# Altium PCB bch-stmnode_v0.2.PcbDoc (part 3 of 3)
Units mm, origin at the board's own origin, x right, y up, seen from the top; angles counter-clockwise.
Board outline 93.3 x 100 mm, 4 copper layers (Top Layer, GND, VCC, Bot Layer), stack 1.564 mm thick; 151 components, 115 nets, 605 pads, 422 vias.
Unrouted connection lines stored in the file: 4.
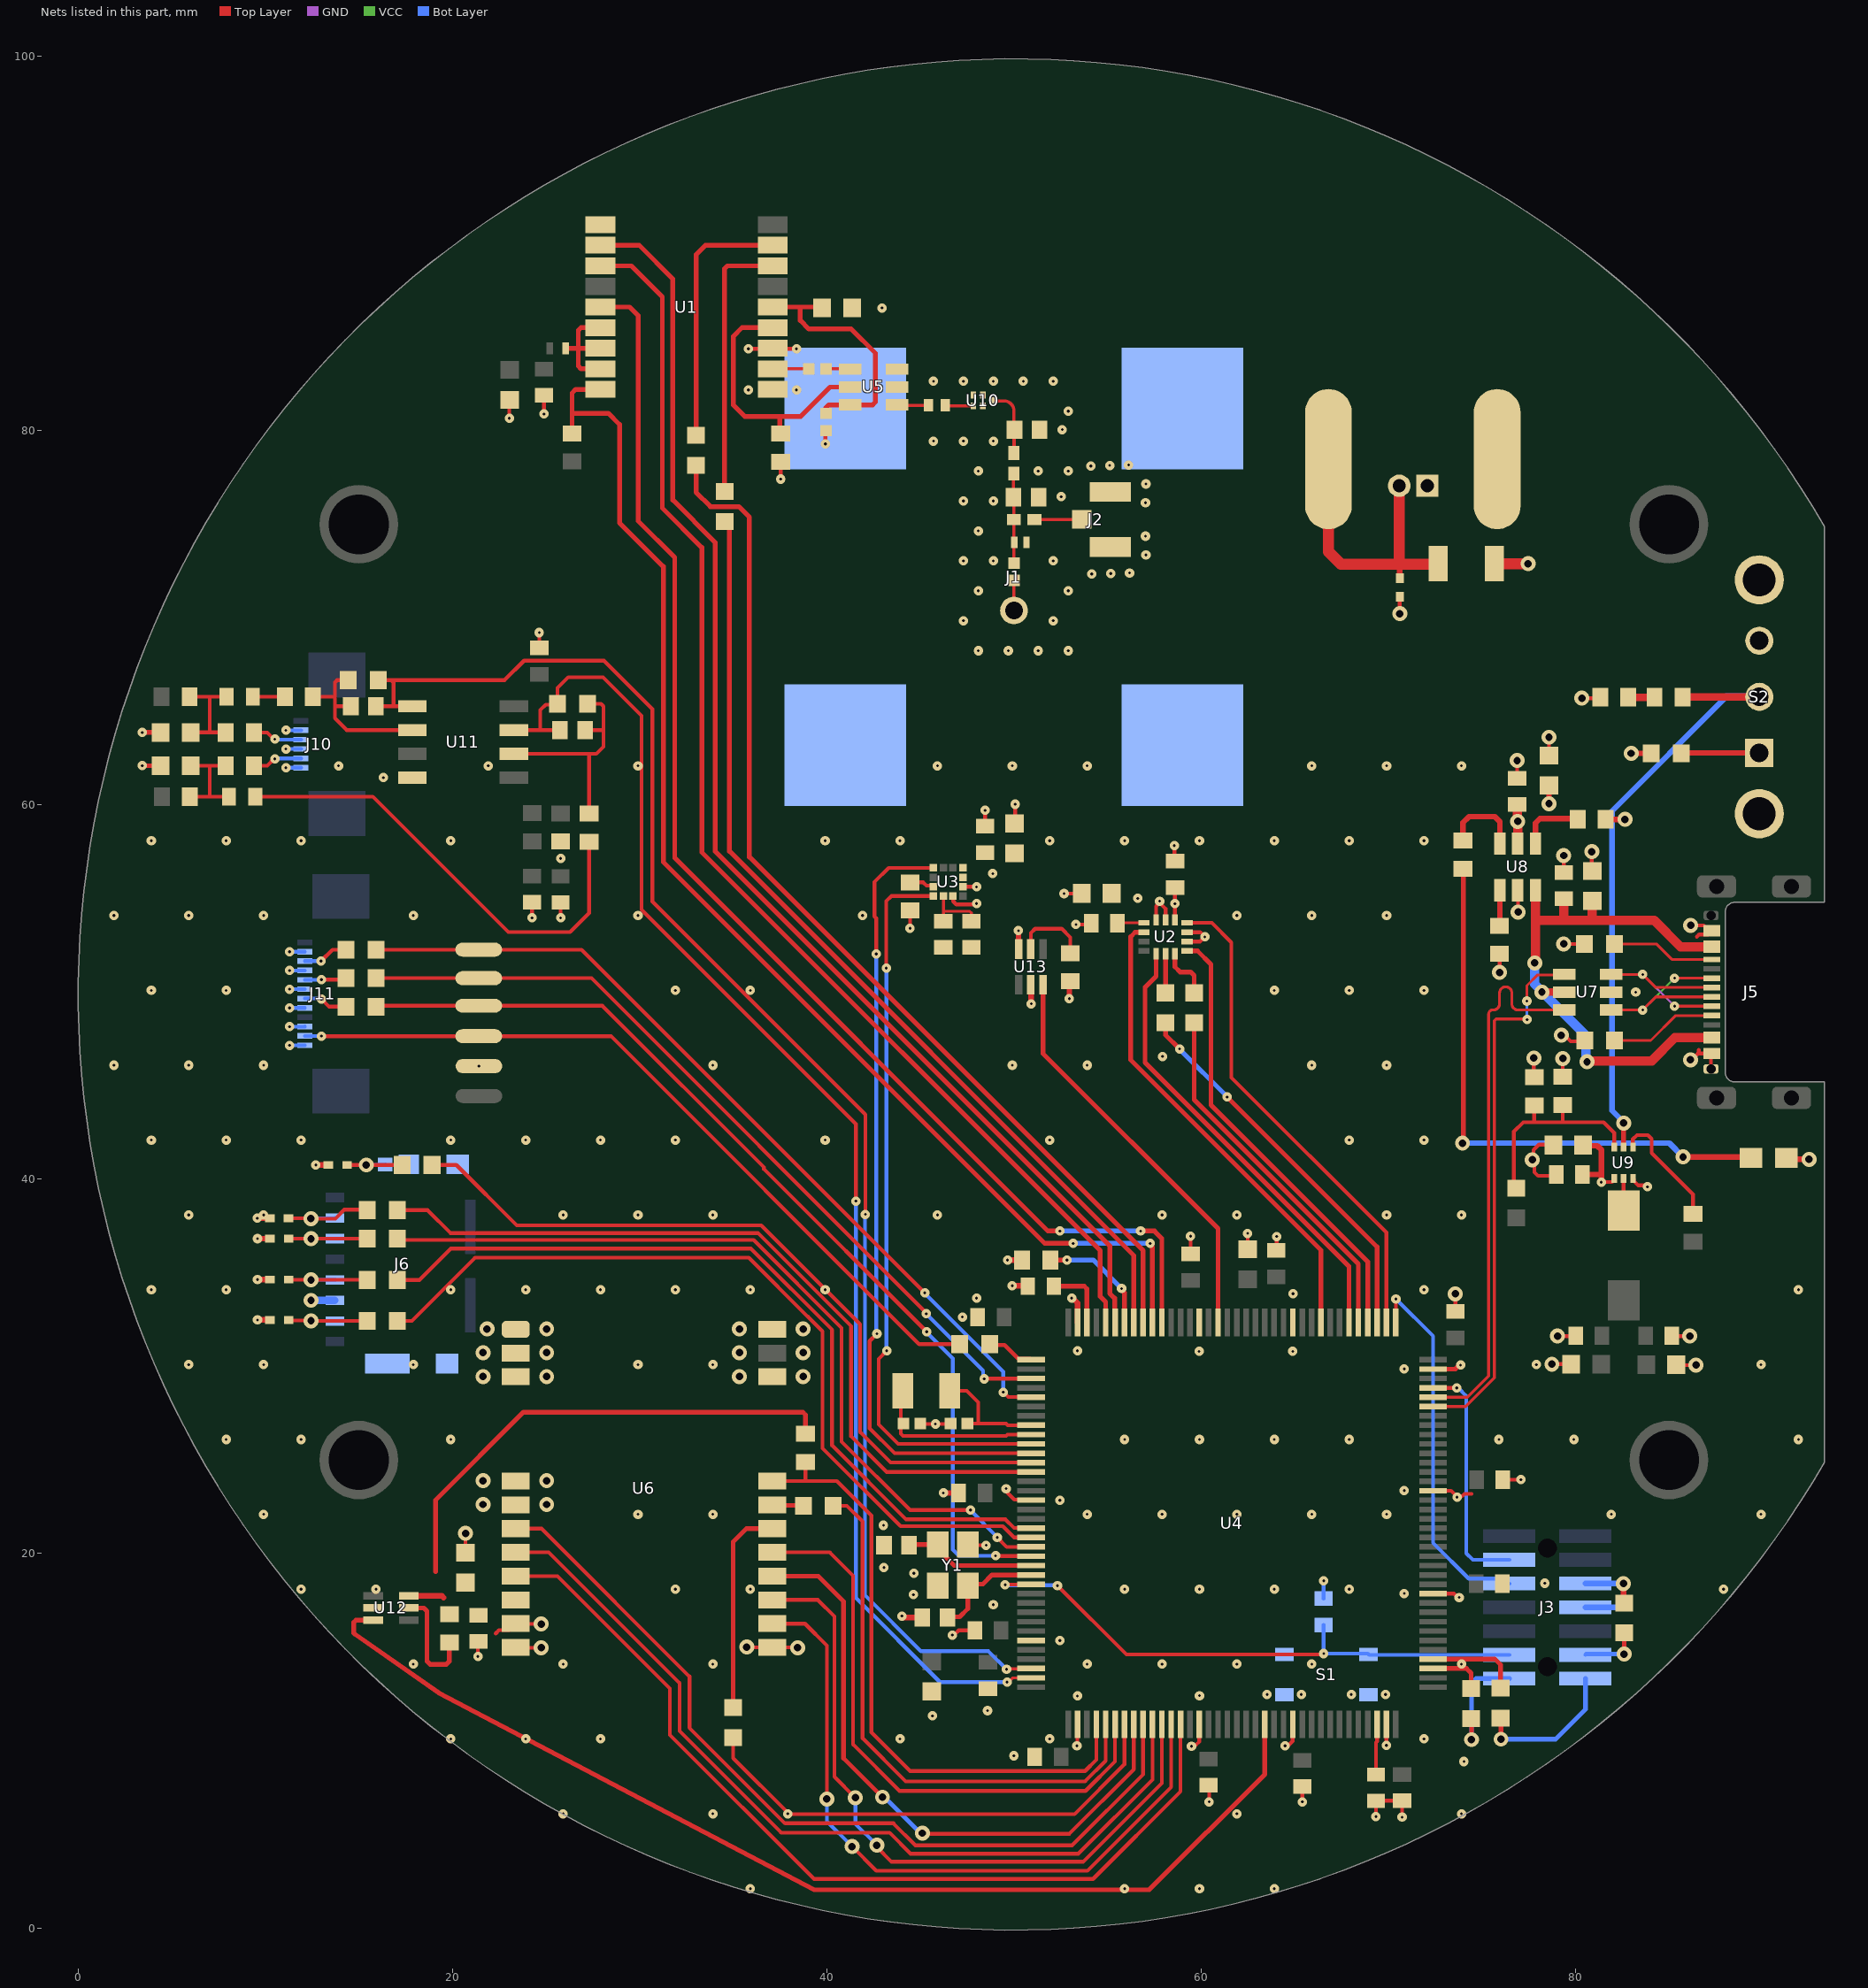
[diagram p4: the nets of this part, all layers, seen from the top]

## Via types
v1: diameter 0.5, hole 0.15, Top Layer to Bot Layer, 346 vias
v2: diameter 0.8, hole 0.4, Top Layer to Bot Layer, 76 vias

## Nets (pads, with @x,y where several pads share a name; then routed paths per layer and width w, separated by ;. In a path a pad name is that pad's centre, name@x,y a point inside that pad or via, vN(x,y) a via of type N, cw(c..) or ccw(c..) an arc to the next point about the centre after c; other vN are vias at no path point) (continued)
+3VIMU: C5.1 C49.1 C50.1 C51.1 C52.1 R58.2 R59.2 U2.5 U2.8 U3.9 U3.10 U13.6 | length 6.1
  Top Layer w0.15: C5.1@55.525,53.683 55.547,53.706 U2.8@56.949,53.706
  Top Layer w0.2: v1(44.45,53.416) R59.2@44.45,54.368 ; U2.5@58.599,53.875 58.599,55.589 C50.1@58.609,55.599
  Top Layer w0.3: v1(50.241,53.289) 50.246,53.284 50.246,52.304 U13.6@50.252,52.299 ; v1(52.959,49.657) 52.959,50.533 R58.2@53.01,50.583
  other v1: 58.599,54.732 56.617,55.016 48.87,56.337
+3VLORA: C9.1 C29.1 R12.2 R57.2 U6.9 U12.6 | length 28.5
  Top Layer w0.25: 19.101,19.028 19.101,22.86 23.8,27.559 38.716,27.559 38.862,27.413 R12.2@38.862,26.404
  Top Layer w0.3: U12.6@17.663,17.744 19.441,17.744 19.533,17.653
+V_USB: C31.1 C32.1 J5.A4 J5.A9 U7.5 U8.6 | length 30.8
  Top Layer w0.15: J5.A4@87.288,47.574 J5.A4@87.292,47.57 ; J5.A9@87.288,52.426 J5.A9@87.292,52.43
  Top Layer w0.4: v2(78.208,50) U7.5@79.4,50
  Top Layer w0.5: v2(77.826,51.562) 77.861,51.598 U8.6@77.861,55.443 ; 78.042,53.848 79.426,53.848 ; C32.1@79.375,55.002 79.375,53.899 79.426,53.848 ; v2(80.62,46.279) 80.67,46.33 84.074,46.33 85.319,47.574 J5.A4@87.288,47.574 ; C31.1@80.899,54.877 80.899,53.848 ; J5.A9@87.288,52.426 85.623,52.426 84.201,53.848 80.899,53.848 ; 79.426,53.848 80.899,53.848
  Bot Layer w0.5: v2(77.826,51.562) 77.826,50.443 78.208,50.06 v2(78.208,50) ; v2@78.247,49.997 80.566,47.679 80.566,46.333 v2(80.62,46.279)
+VCAP1: C39.1 U4.70 | length 2.7
  Top Layer w0.2: C39.1@69.342,8.193 69.342,9.906 69.399,9.963 69.399,10.869 U4.70@69.402,10.872
+VCAP2: C40.1 U4.142 | length 3.6
  Top Layer w0.25: C40.1@52.135,34.29 53.756,34.29 53.902,34.144 U4.142@53.902,32.348
ANT_OFF_3: R32.2 U1.13 U5.5 | length 14.1
  Top Layer w0.254: U1.13@37.112,85.514 35.476,85.514 35.001,85.039 35.001,81.382 35.611,80.772 37.49,80.772 ; R32.2@37.541,79.846 37.49,79.896 37.49,80.772 ; U5.5@41.25,82.337 40.173,82.337 38.608,80.772 37.49,80.772
BAT+: C24.1 C25.1 C33.1 C34.1 D1.1 F1.2 R22.2 U8.2 U9.1 | length 11.8
  Top Layer w0.2: v1(81.382,39.846) 81.389,39.853 81.96,39.853 82.075,39.969 U9.1@82.075,40.056
  Top Layer w0.3: v2(78.588,60.071) C33.1@78.588,61.049 ; C25.1@80.38,40.259 81.382,40.259 ; C24.1@80.416,41.834 80.454,41.796 81.166,41.796 81.382,41.579 81.382,40.259 ; v1(81.382,39.846) 81.382,40.259 ; v2(82.982,62.763) R22.2@84.049,62.763 ; D1.1@91.272,41.148 91.349,41.072 v2(92.481,41.072)
  Top Layer w0.5: C34.1@76.886,60.031 76.898,60.019 76.898,59.144 v2(76.911,59.131) U8.2@76.911,57.943
  Top Layer w0.6: F1.2@75.668,72.898 v2(77.47,72.898)
BAT_ULVO_5: R23.2 S2.2 U9.5 | length 33.4
  Top Layer w0.2: R23.2@85.725,65.761 R23.2@85.75,65.786
  Top Layer w0.25: U9.5@82.575,41.732 v2(82.575,43.002)
  Top Layer w0.4: R23.2@85.75,65.786 S2.2@90.17,65.786
  Bot Layer w0.3: v2(82.575,43.002) 82.575,43.058 81.952,43.682 81.952,59.676 88.062,65.786
  Bot Layer w0.4: 88.062,65.786 S2.2@90.17,65.786
BUSY: U4.47 U6.14 | length 37.4
  Top Layer w0.2: U6.14@37.084,17.526 39.522,17.526 40.411,16.637 40.411,8.077 v2(41.529,6.96) ; v2(42.672,4.42) 42.672,4.318 43.459,3.531 53.696,3.531 57.902,7.737 U4.47@57.902,10.872
  Bot Layer w0.2: v2(41.529,6.96) 41.529,5.563 v2(42.672,4.42)
CLK: R3.1 U4.41 | length 29.8
  Top Layer w0.2: R3.1@40.348,22.555 41.072,22.555 41.91,21.717 41.91,10.135 44.221,7.823 53.797,7.823 54.902,8.928 U4.41@54.902,10.872
D_1_N: J5.A7 J5.B7 U7.3 | length 10.1
  Top Layer w0.15: U7.3@81.9,50.95 v1(83.594,50.95) 84.294,50.25 J5.A7@87.292,50.25 ; v1(85.296,49.25) J5.B7@87.292,49.25
  GND w0.11: v1@83.595,50.95 v1(85.296,49.25)
D_1_P: J5.A6 J5.B6 U7.1 | length 10.1
  Top Layer w0.15: U7.1@81.9,49.05 v1(83.594,49.05) 84.294,49.75 J5.A6@87.292,49.75 ; v1(85.293,50.749) J5.B6@87.292,50.75
  VCC w0.11: v1(83.594,49.05) v1(85.293,50.749)
DIO1: U4.48 U6.13 | length 37.5
  Top Layer w0.2: U6.13@37.084,16.256 38.837,16.256 40.005,15.088 v2(40.005,6.883) ; v2(41.351,4.343) 42.647,3.048 53.924,3.048 58.402,7.526 U4.48@58.402,10.872
  Bot Layer w0.2: v2(40.005,6.883) 40.005,5.69 v2(41.351,4.343)
DIO2: U4.49 U6.8 | length 49.2
  Top Layer w0.2: U6.8@23.384,18.796 25.611,18.796 31.623,12.784 31.623,10.312 39.319,2.616 54.229,2.616 58.902,7.289 U4.49@58.902,10.872
G\P\S\_\R\E\S\E\T\: R30.1 U1.9 U4.135 | length 69.6
  Top Layer w0.254: R30.1@26.391,79.858 26.391,80.937 ; U1.9@27.912,82.214 26.588,82.214 26.391,82.017 26.391,80.937 ; v1(53.162,36.576) 51.652,36.576 31.267,56.96 31.267,72.746 28.931,75.082 28.931,80.337 28.33,80.937 26.391,80.937 ; v1(57.277,36.576) 57.277,36.509 57.402,36.384 U4.135@57.402,32.348
  Bot Layer w0.254: v1(53.162,36.576) v1(57.277,36.576)
GND: C3.2 C4.2 C5.2 C6.2 C7.2 C8.1 C9.2 C10.2 C11.2 C12.2 C13.2 C14.2 C15.2 C16.2 C17.2 C18.2 C19.2 C20.2 C21.2 C22.2 C23.2 C24.2 C25.2 C26.2 C27.2 C28.2 C29.2 C30.2 C31.2 C32.2 C33.2 C34.2 C35.2 C36.2 C37.2 C38.2 C39.2 C40.2 C41.2 C42.2 C43.2 C44.2 C47.2 C48.2 C49.2 C50.2 C51.2 C52.2 C53.2 C54.2 C56.2 C57.2 D2.1 D3.2 D4.1 D5.1 D6.1 D7.1 D8.1 J1.2 J1.3 J1.4 J1.5 J2.2 J2.3 J3.5 J3.7 J4.1 J5.A1 J5.A12 J5.MH1 J6.6 J6.10 J6.11 J6.12 J6.13 J10.2 J10.4 J10.6 J11.2 J11.4 J11.6 J11.8 J11.10 J11.12 pad.4@75.819,78.486 pad.8@21.413,46.05 R9.1 R13.1 R17.2 R18.2 R19.1 R21.1 R24.1 R28.1 R29.2 R32.1 R49.2 S1.3 S1.4 S2.3 S2.4 S2.5 U1.1 U1.10 U1.12 U2.2 U2.3 U2.6 U2.7 U3.6 U3.8 U4.16 U4.31 U4.38 U4.51 U4.61 U4.71 U4.83 U4.94 U4.107 U4.120 U4.130 U4.143 U5.2 U5.3 U6.1 U6.2 U6.3 U6.4 U6.5 U6.10 U6.11 U6.12 U6.20 U6.22 U7.2 U8.5 U9.3 U10.2 U10.3 U10.5 U11.4 U12.2 U13.2 Y1.2 Y1.4 | length 106.5
  Top Layer w0.2: C29.2@20.701,20.053 v2(20.701,21.082) ; v1(21.361,14.503) 21.361,15.277 C9.2@21.387,15.302 ; 22.313,15.734 22.485,15.906 23.034,15.906 U6.10@23.384,16.256 23.402,16.238 v2(24.746,16.238) ; v1(23.038,80.67) 23.038,81.623 C3.2@23.063,81.648 ; U6.11@23.384,14.986 23.402,14.968 v2(24.746,14.968) ; v1(24.257,53.975) C56.2@24.257,54.799 ; C6.2@24.638,68.391 v1(24.638,69.215) ; v1(24.892,80.899) C4.2@24.892,81.901 ; v1(25.781,53.975) C57.2@25.781,54.799 ; v2(35.722,15.004) 35.74,14.986 U6.12@37.084,14.986 38.428,14.986 v2(38.446,14.968) ; v1(35.814,84.379) 37.077,84.379 U1.12@37.112,84.414 37.147,84.379 v1(38.379,84.379) ; v1(37.541,77.419) R32.1@37.541,78.346 ; v1(39.929,79.299) 39.929,79.982 C8.1@39.954,80.007 ; C47.2@45.002,26.949 45.026,26.925 46.592,26.925 C37.2@46.616,26.949 ; v1(46.711,15.646) 46.792,15.646 47.046,15.9 C10.2@47.916,15.9 ; U3.6@46.736,55.142 46.756,55.122 46.756,54.854 46.918,54.692 47.961,54.692 v1(48.006,54.737) ; U3.8@47.286,55.642 47.294,55.634 47.998,55.634 v1(48.006,55.626) ; Y1.2@47.536,20.48 47.569,20.447 v1(48.514,20.447) ; C52.2@48.463,58.866 v1(48.463,59.715) ; v1(49.581,23.47) 49.638,23.412 49.638,23.26 50.02,22.878 50.896,22.878 U4.16@50.914,22.86 ; C51.2@50.038,59.017 50.063,59.042 v1(50.063,60.046) ; U13.2@50.902,50.399 U13.2@50.914,50.386 ; v1@50.914,49.39 v1(50.927,49.378) ; v1(52.68,55.27) 53.605,55.27 C49.2@53.618,55.283 ; v1(53.315,53.619) 54.061,53.619 C5.2@54.125,53.683 ; v1(53.363,9.732) 53.383,9.751 53.383,10.853 U4.38@53.402,10.872 ; U2.7@57.599,53.856 57.599,54.597 v1@57.785,54.783 ; v1(57.785,54.864) v1@57.785,54.783 ; U2.6@58.099,53.856 58.099,54.468 v1@57.785,54.783 ; v1(58.572,57.836) 58.572,57.036 C50.2@58.609,56.999 ; U2.2@59.249,52.706 59.938,52.706 60.192,52.959 v1(60.198,52.959) 59.951,53.206 U2.3@59.249,53.206 ; C16.2@59.436,36.006 v1(59.436,36.957) ; v1(59.487,9.703) 59.544,9.76 59.707,9.76 59.904,9.958 59.904,10.87 U4.51@59.902,10.872 ; C15.2@60.401,7.631 60.427,7.606 v1(60.427,6.731) ; C38.2@62.484,36.258 v1(62.484,37.109) ; C17.2@64.008,36.195 64.033,36.22 v1(64.033,36.943) ; v1(64.491,9.728) 64.548,9.786 64.697,9.786 64.887,9.975 64.887,10.857 U4.61@64.902,10.872 ; v1(65.405,6.731) C14.2@65.405,7.555 ; v1(69.342,5.944) C39.2@69.342,6.793 C12.2@70.739,6.793 v1(70.739,5.918) ; v1(69.902,9.754) U4.71@69.902,10.872 ; v2(70.612,70.231) D2.1@70.612,71.128 ; U4.83@72.39,17.86 73.499,17.86 73.706,17.653 v1(73.787,17.653) ; U4.94@72.39,23.36 72.398,23.352 73.355,23.352 73.673,23.035 v1(73.673,23.012) ; C18.2@73.584,32.933 v2(73.584,33.884) ; v1@73.684,23.024 73.73,23.07 73.946,23.07 74.066,23.19 74.447,23.19 ; v2(75.946,51.054) R21.1@75.946,52.043 ; C20.2@76.113,23.952 v1(77.089,23.952) ; C34.2@76.886,61.431 v2(76.886,62.382) ; U8.5@76.911,55.443 76.937,55.417 v2(76.937,54.28) ; v2(77.775,46.482) 77.775,45.479 R28.1@77.8,45.454 ; C33.2@78.588,62.649 v2(78.588,63.627) ; v2(78.74,30.124) C30.2@79.769,30.124 ; C24.2@78.816,41.834 78.791,41.859 78.054,41.859 77.765,41.57 77.765,41.113 v2(77.699,41.046) 77.813,40.932 77.813,40.373 78.003,40.183 78.904,40.183 C25.2@78.98,40.259 ; v2(79.045,31.623) 79.996,31.623 C28.2@80.021,31.648 ; v2(79.248,47.701) 79.41,47.701 79.741,47.371 80.442,47.371 R17.2@80.493,47.422 ; R29.2@79.324,45.479 v2(79.324,46.457) ; v2(79.375,52.578) R18.2@80.48,52.578 ; C32.2@79.375,56.402 v2(79.375,57.302) ; v2(80.34,65.71) 81.279,65.71 R24.1@81.329,65.761 ; v2(80.874,57.506) 80.874,56.502 C31.2@80.899,56.477 ; U9.3@83.075,40.056 83.125,40.006 83.125,39.912 83.363,39.675 83.688,39.675 83.764,39.599 v1(83.845,39.599) ; C26.2@85.155,31.648 85.18,31.623 v2(86.106,31.623) ; C27.2@85.382,30.099 85.407,30.074 v2(86.436,30.074) ; v2(86.149,46.39) 86.213,46.39 86.544,46.72 ; v2(86.157,53.569) 86.854,53.569 87.142,53.28 J5.A12@87.292,53.28 87.092,53.08 86.608,53.08 86.487,52.959 ; 86.589,46.914 86.589,46.765 86.544,46.72 ; J5.MH1@87.242,45.9 87.242,46.67 J5.A1@87.292,46.72 86.544,46.72
  Top Layer w0.25: v1(3.429,62.103) C44.2@4.407,62.103 ; v1(3.429,63.881) C43.2@4.407,63.881 ; U4.107@72.39,29.86 73.582,29.86 73.796,30.074 v1(73.863,30.074)
  Top Layer w0.3: v1(9.576,37.922) D4.1@10.244,37.922 ; v1(9.584,32.487) D7.1@10.252,32.487 ; v1(9.584,34.646) D6.1@10.252,34.646 ; v1(9.584,36.83) D5.1@10.252,36.83 ; v1(12.7,40.767) D8.1@13.368,40.767 ; v1(44.018,16.662) 44.072,16.662 44.155,16.58 C23.2@45.108,16.58 ; v1(46.228,23.241) C11.2@47.052,23.241 ; v1(49.657,35.687) R49.2@50.443,35.687 ; v1(49.911,34.315) 50.71,34.315 C40.2@50.735,34.29 ; v1@50.914,49.39 U13.2@50.914,50.386 ; v1(53.086,33.655) 53.134,33.655 53.402,33.387 U4.143@53.402,32.348 ; R19.1@81.624,59.233 v2(82.652,59.233) ; v2(82.565,18.4) 82.565,17.396 R13.1@82.601,17.361
  Bot Layer w0.2: v1@11.106,61.996 J10.6@11.909,61.996 ; v1(11.104,63.995) J10.2@11.909,63.996 ; v1@11.176,62.996 J10.4@11.909,62.996 ; v1(11.303,47.158) 11.304,47.16 J11.12@12.109,47.161 J11.12@12.109,47.161 ; v1(11.303,48.158) 11.304,48.16 J11.10@12.109,48.161 J11.10@12.109,48.161 ; v1(11.303,49.158) 11.304,49.16 12.108,49.16 J11.8@12.109,49.161 ; v1(11.303,50.158) 11.304,50.16 J11.6@12.109,50.161 J11.6@12.109,50.161 ; v1(11.303,51.158) 11.304,51.16 J11.4@12.109,51.161 J11.4@12.109,51.161 ; v1(11.303,52.158) 11.304,52.16 12.108,52.16 J11.2@12.109,52.161 ; v2(12.446,33.533) v2@12.448,33.531 ; J6.6@13.718,33.531 J6.6@13.72,33.529 ; C21.2@66.548,17.591 v1(66.548,18.542) ; J3.5@80.536,18.397 J3.5@80.54,18.4
  Bot Layer w0.3: v1(11.104,61.995) v1@11.106,61.996 ; v1(11.104,63.995) v1(11.104,63.995) ; v1@11.175,62.995 v1@11.176,62.996 ; J3.7@80.538,17.128 82.564,17.128 ; J3.5@80.54,18.4 v2(82.565,18.4)
  Bot Layer w0.4: v2@12.448,33.531 J6.6@13.718,33.531
  other v1: 35.913,2.097 55.913,2.097 59.913,2.097 63.913,2.097 25.913,6.097 33.913,6.097 37.913,6.097 61.913,6.097 73.913,6.097 74.041,8.89 50,9.196 19.913,10.097 23.913,10.097 27.913,10.097 43.913,10.097 51.913,10.097 71.913,10.097 45.644,11.328 48.59,11.608 53.391,12.39 59.911,12.41 63.525,12.473 65.351,12.473 68.025,12.473 69.851,12.473 17.913,14.097 25.913,14.097 33.913,14.097 53.913,14.097 57.913,14.097 61.913,14.097 65.913,14.097 73.913,14.097 52.452,15.351 48.895,17.272 44.628,17.805 70.852,17.869 11.913,18.097 15.913,18.097 31.913,18.097 35.913,18.097 55.913,18.097 59.913,18.097 63.913,18.097 67.913,18.097 87.913,18.097 78.359,18.415 44.653,18.948 43.053,19.253 43.028,21.514 9.913,22.097 29.913,22.097 33.913,22.097 53.913,22.097 57.913,22.097 61.913,22.097 65.913,22.097 69.913,22.097 81.913,22.097 89.913,22.097 52.452,22.851 70.852,23.369 7.913,26.097 11.913,26.097 19.913,26.097 55.913,26.097 59.913,26.097 63.913,26.097 67.913,26.097 75.913,26.097 79.913,26.097 91.913,26.097 45.806,26.925 70.852,29.869 5.913,30.097 9.913,30.097 17.913,30.097 29.913,30.097 33.913,30.097 77.913,30.097 89.913,30.097 59.893,30.81 64.893,30.81 53.391,30.836 47.244,32.639 48.006,33.655 64.911,33.886 3.913,34.097 7.913,34.097 19.913,34.097 23.913,34.097 27.913,34.097 31.913,34.097 35.913,34.097 39.913,34.097 71.913,34.097 91.913,34.097 5.913,38.097 9.913,38.097 25.913,38.097 29.913,38.097 33.913,38.097 45.913,38.097 57.913,38.097 61.913,38.097 69.913,38.097 73.913,38.097 3.913,42.097 7.913,42.097 11.913,42.097 19.913,42.097 23.913,42.097 27.913,42.097 31.913,42.097 39.913,42.097 51.913,42.097 67.913,42.097 71.913,42.097 21.413,46.05 1.913,46.097 5.913,46.097 9.913,46.097 33.913,46.097 49.913,46.097 53.913,46.097 65.913,46.097 69.913,46.097 57.939,46.567 83.22,50 3.913,50.097 7.913,50.097 31.913,50.097 35.913,50.097 63.913,50.097 67.913,50.097 71.913,50.097 1.913,54.097 5.913,54.097 9.913,54.097 17.913,54.097 29.913,54.097 41.913,54.097 61.913,54.097 65.913,54.097 69.913,54.097 25.781,57.15 3.913,58.097 7.913,58.097 11.913,58.097 19.913,58.097 39.913,58.097 43.913,58.097 51.913,58.097 55.913,58.097 59.913,58.097 63.913,58.097 67.913,58.097 71.913,58.097 16.307,61.468 13.913,62.097 21.913,62.097 29.913,62.097 45.913,62.097 49.913,62.097 53.913,62.097 65.913,62.097 69.913,62.097 73.913,62.097 11.104,62.995 48.1,68.248 49.7,68.248 51.3,68.248 52.9,68.248 47.3,69.848 52.1,69.848 48.1,71.448 52.9,71.448 54.159,72.35 55.169,72.376 56.178,72.401 47.3,73.048 48.9,73.048 52.1,73.048 57.053,73.361 57.028,74.37 48.1,74.648 57.028,76.15 47.3,76.248 48.9,76.248 52.527,76.479 57.053,77.16 48.1,77.848 51.3,77.848 52.9,77.848 54.108,78.119 55.118,78.145 56.128,78.17 45.7,79.448 47.3,79.448 48.9,79.448 52.578,80.061 52.9,81.048 35.814,82.179 38.379,82.179 45.7,82.648 47.3,82.648 48.9,82.648 50.5,82.648 52.1,82.648 42.951,86.563
  other v2: 21.631,22.624 25.035,22.624 21.631,23.894 25.035,23.894 21.631,29.464 25.035,29.464 35.331,29.464 38.735,29.464 21.631,30.734 25.035,30.734 35.331,30.734 38.735,30.734 21.844,32.004 25.035,32.004 35.331,32.004 38.735,32.004
GPS_RX: U1.3 U4.140 | length 68.6
  Top Layer w0.254: U1.3@27.912,88.814 29.55,88.814 31.217,87.147 31.217,75.87 33.325,73.762 33.325,57.48 54.61,36.195 54.61,33.739 54.902,33.447 U4.140@54.902,32.348
GPS_SCL: R36.1 U4.136 | length 56.6
  Top Layer w0.254: R36.1@33.02,78.156 33.02,76.708 33.782,75.946 35.306,75.946 35.865,75.387 35.865,57.226 56.902,36.189 U4.136@56.902,32.348
GPS_SDA: R35.1 U4.137 | length 51.9
  Top Layer w0.254: R35.1@34.544,75.146 34.798,74.892 34.798,57.531 56.402,35.927 U4.137@56.402,32.348
GPS_TX: U1.2 U4.139 | length 70.2
  Top Layer w0.254: U1.2@27.912,89.914 29.974,89.914 31.775,88.113 31.775,76.302 34.036,74.041 34.036,57.531 55.118,36.449 55.118,33.909 55.379,33.648 55.379,32.371 U4.139@55.402,32.348
GPS_WAKE-UP: U1.5 U4.134 | length 70.9
  Top Layer w0.254: U1.5@27.912,86.614 29.464,86.614 29.921,86.157 29.921,75.184 31.877,73.228 31.877,57.176 51.816,37.236 v1(52.451,37.236) ; v1(56.769,37.236) 57.506,37.236 57.902,36.84 U4.134@57.902,32.348
  Bot Layer w0.254: v1(52.451,37.236) v1(56.769,37.236)
IMU_CS: U2.12 U4.114 | length 24.5
  Top Layer w0.25: U2.12@57.599,52.056 57.599,50.855 57.009,50.264 57.009,46.242 67.902,35.349 U4.114@67.902,32.348
IMU_INT1: U2.4 U4.110 | length 26.5
  Top Layer w0.2: U2.4@59.249,53.706 60.569,53.706 61.62,52.654 61.62,45.441 69.902,37.159 U4.110@69.902,32.348
IMU_INT2: U2.9 U4.117 | length 25.6
  Top Layer w0.25: U2.9@56.949,53.206 56.943,53.199 56.476,53.199 56.236,52.959 56.236,46.38 66.402,36.214 U4.117@66.402,32.348
IMU_SCK: R62.2 U4.111 | length 20.7
  Top Layer w0.25: R62.2@58.101,48.362 58.101,47.715 v1(58.852,46.965) ; v1(61.392,44.399) 69.402,36.389 U4.111@69.402,32.348
  Bot Layer w0.25: v1(58.852,46.965) 58.852,46.952 61.392,44.412 v1(61.392,44.399)
IMU_SDI: R64.2 U4.113 | length 19.6
  Top Layer w0.25: R64.2@59.625,48.362 59.625,44.261 68.402,35.484 U4.113@68.402,32.348
IMU_SDO: U2.1 U4.112 | length 24.2
  Top Layer w0.25: U2.1@59.249,52.206 59.808,52.206 60.528,51.486 60.528,43.967 68.902,35.594 U4.112@68.902,32.348
LORA_MISO: U4.42 U6.16 | length 31.4
  Top Layer w0.2: U6.16@37.084,20.066 40.157,20.066 41.402,18.821 41.402,9.804 43.891,7.315 53.823,7.315 55.402,8.895 U4.42@55.402,10.729
LORA_MOSI: R4.1 U4.43 | length 26.4
  Top Layer w0.2: R4.1@35.001,10.173 35.001,9.068 37.998,6.071 53.238,6.071 55.902,8.734 U4.43@55.902,10.764
LORA_NRST: U4.44 U6.15 | length 33.8
  Top Layer w0.2: v2(45.11,5.06) 45.141,5.029 52.959,5.029 56.402,8.472 U4.44@56.402,10.872
  Top Layer w0.25: U6.15@37.084,18.796 39.548,18.796 40.894,17.45 40.894,9.068 v2(42.977,6.985)
  Bot Layer w0.25: v2(42.977,6.985) 43.081,6.985 45.006,5.06 v2(45.11,5.06)
LORA_NSS: R12.1 U4.40 U6.19 | length 33.7
  Top Layer w0.2: U6.19@37.084,23.876 38.862,23.876 ; R12.1@38.862,24.904 38.862,23.876 ; U4.40@54.402,10.872 54.402,8.979 53.805,8.382 44.45,8.382 42.383,10.449 42.383,22.031 40.538,23.876 38.862,23.876
LORA_RXEN: U4.45 U6.6 | length 46.4
  Top Layer w0.2: U6.6@23.384,21.336 24.765,21.336 32.664,13.437 32.664,10.693 37.77,5.588 43.561,5.588 44.739,4.41 53.102,4.41 56.902,8.21 U4.45@56.902,10.872
LORA_TXEN: U4.46 U6.7 | length 46.8
  Top Layer w0.2: U6.7@23.384,20.066 25.146,20.066 32.131,13.081 32.131,10.516 37.567,5.08 43.358,5.08 44.475,3.962 53.442,3.962 57.402,7.923 U4.46@57.402,10.872
MAG_SCL: U3.1 U4.11 | length 42
  Top Layer w0.2: v1(42.647,52.045) 42.647,53.952 42.545,54.054 42.545,55.88 43.307,56.642 U3.1@45.686,56.642 ; v1(42.68,31.75) 42.291,31.361 42.291,26.695 43.626,25.36 U4.11@50.914,25.36
  Bot Layer w0.2: v1(42.647,52.045) 42.647,31.783 v1(42.68,31.75)
MAG_SDA: U3.4 U4.10 | length 39.3
  Top Layer w0.2: v1(43.18,51.283) 43.18,54.864 43.458,55.142 U3.4@45.686,55.142 ; v1(43.205,30.836) 42.774,30.404 42.774,26.899 43.812,25.86 U4.10@50.914,25.86
  Bot Layer w0.2: v1(43.18,51.283) 43.193,51.27 43.193,30.848 v1(43.205,30.836)
NetC1_1: C1.1 J1.1 | length 1.6
  Top Layer w0.175: J1.1@50,70.392 C1.1@50,72.005
NetC1_2: C1.2 C35.1 D3.1 R1.1 R31.1 | length 4.8
  Top Layer w0.175: C1.2@50,72.925 50,73.752 50.018,73.965 D3.1@50.018,74.041 ; R31.1@50,77.716 49.978,77.429 C35.1@49.978,76.454 49.996,76.051 R1.1@49.996,75.26 49.996,74.177 D3.1@50.01,74.04
NetC2_1: C2.1 U5.4 | length 1.3
  Top Layer w0.175: C2.1@39.957,83.312 41.224,83.312 cw(c41.224,83.287) U5.4@41.25,83.287
NetC2_2: C2.2 U1.11 | length 1.9
  Top Layer w0.175: U1.11@37.112,83.314 39.037,83.314 C2.2@39.037,83.312
NetC22_1: C22.1 U4.23 Y1.3 | length 7.2
  Top Layer w0.25: C22.1@44.393,20.447 44.426,20.48 Y1.3@45.936,20.48 ; Y1.3@45.898,20.518 46.386,20.03 46.386,19.781 46.807,19.36 U4.23@50.914,19.36
NetC23_1: C23.1 U4.24 Y1.1 | length 6.1
  Top Layer w0.25: C23.1@46.448,16.58 46.484,16.617 47.097,16.617 47.536,17.056 Y1.1@47.536,18.28 47.623,18.368 48.34,18.368 48.832,18.86 U4.24@50.914,18.86
NetC36_1: C36.1 R31.2 U10.1 | length 3.7
  Top Layer w0.175: U10.1@48.836,81.592 49.472,81.592 cw(c49.472,81.064) 50,81.064 50,80.463 C36.1@50.028,80.061 50.003,79.658 50.003,79.104 R31.2@50,78.816
NetC37_1: C37.1 U4.8 Y2.2 | length 6.4
  Top Layer w0.2: Y2.2@46.564,28.702 47.473,28.702 48.09,28.084 48.09,26.949 ; C37.1@47.516,26.949 48.09,26.949 ; U4.8@50.914,26.86 49.67,26.86 49.581,26.949 48.09,26.949
NetC43_1: C43.1 C58.1 R10.1 R33.2 | length 5.8
  Top Layer w0.2: R10.1@5.957,65.786 7.036,65.786 ; C43.1@6.007,63.881 7.036,63.881 ; R33.2@7.886,63.881 7.036,63.881 ; C58.1@7.936,65.786 7.036,65.786 ; 7.036,63.881 7.036,65.786
NetC44_1: C44.1 C55.1 R5.1 R34.2 | length 5.6
  Top Layer w0.2: R5.1@5.969,60.452 7.036,60.452 ; C44.1@6.007,62.103 7.036,62.103 ; R34.2@7.886,62.103 7.036,62.103 ; C55.1@8.063,60.452 7.036,60.452 ; 7.036,60.452 7.036,62.103
NetC45_1: C45.1 R2.1 R11.2 U11.2 | length 9.1
  Top Layer w0.2: R11.2@12.549,65.786 13.687,65.786 13.716,65.757 ; R2.1@14.44,66.675 13.833,66.675 13.716,66.558 13.716,65.786 13.716,65.278 ; C45.1@14.57,65.278 13.716,65.278 ; U11.2@17.863,64.008 14.351,64.008 13.716,64.643 13.716,65.278
NetC45_2: C45.2 R2.2 U4.34 U11.1 | length 82.2
  Top Layer w0.15: v1(49.606,13.818) 49.627,13.839 50.893,13.839 U4.34@50.914,13.86
  Top Layer w0.2: C45.2@15.91,65.278 16.849,65.278 ; R2.2@16.04,66.675 16.732,66.675 ; U11.1@17.863,65.278 16.849,65.278 ; v1(42.062,38.125) 42.062,43.459 30.683,54.839 30.683,65.126 28.092,67.716 23.825,67.716 22.784,66.675 16.732,66.675 ; 16.732,66.675 16.849,66.558 16.849,65.278
  Bot Layer w0.2: v1(42.062,38.125) 42.037,38.1 42.037,17.78 45.034,14.783 48.641,14.783 v1(49.606,13.818)
NetC46_1: C46.1 R6.1 R7.2 U11.6 | length 12.2
  Top Layer w0.2: U11.6@23.285,62.738 27.305,62.738 ; C46.1@27.086,64.008 28.003,64.008 28.067,64.072 ; R6.1@27.216,65.405 27.94,65.405 28.067,65.278 28.067,64.072 ; R7.2@27.305,59.539 27.305,62.738 ; 27.305,62.738 27.686,62.738 28.067,63.119 28.067,64.072
NetC46_2: C46.2 R6.2 U4.35 U11.7 | length 74.2
  Top Layer w0.15: v1(49.632,13.132) 49.723,13.132 49.952,13.36 U4.35@50.914,13.36
  Top Layer w0.2: U11.7@23.285,64.008 24.689,64.008 ; C46.2@25.746,64.008 24.689,64.008 ; v1(41.554,38.837) 41.554,42.951 30.099,54.407 30.099,54.99 30.1,54.991 30.1,63.405 30.099,63.406 30.099,64.77 28.042,66.827 26.187,66.827 25.616,66.256 R6.2@25.616,65.405 25.58,65.369 24.983,65.369 24.689,65.075 24.689,64.008
  Bot Layer w0.2: v1(41.554,38.837) 41.554,17.628 46.05,13.132 v1(49.632,13.132)
NetC47_1: C47.1 U4.9 Y2.1 | length 9.5
  Top Layer w0.2: Y2.1@44.064,28.702 43.956,28.595 43.956,27.095 C47.1@44.102,26.949 43.956,26.804 43.956,26.406 44.074,26.289 49.581,26.289 49.652,26.36 U4.9@50.914,26.36
NetC53_1: C53.1 C54.1 U3.5 | length 3.7
  Top Layer w0.15: C53.1@46.228,53.786 46.236,53.794 46.236,54.326 ; U3.5@46.236,55.142 46.236,54.326 ; C54.1@47.498,54.015 C54.1@47.727,53.786 47.727,54.238 47.639,54.326 46.236,54.326
NetC55_2: C55.2 R7.1 | length 25.1
  Top Layer w0.2: C55.2@9.463,60.452 15.748,60.452 22.987,53.213 26.289,53.213 27.305,54.229 R7.1@27.305,58.039
NetC58_2: C58.2 R11.1 | length 1.7
  Top Layer w0.2: C58.2@9.336,65.786 R11.1@11.049,65.786
NetD1_2: D1.2 R25.2 | length 30.4
  Top Layer w0.25: v2(73.965,41.935) 74.016,41.986 74.016,56.578 R25.2@73.99,56.603
  Top Layer w0.3: v2(85.75,41.199) 89.322,41.199 D1.2@89.372,41.148
  Bot Layer w0.3: v2(73.965,41.935) 85.014,41.935 v2(85.75,41.199)
NetD2_2: D2.2 F1.1 J4.2 pad.4@66.802,78.486 | length 16
  Top Layer w0.3: D2.2@70.612,72.128 70.612,72.873
  Top Layer w0.6: pad.4@66.802,78.486 66.802,73.533 67.462,72.873 70.585,72.873 ; J4.2@70.585,77.064 70.585,72.873 ; F1.1@72.668,72.898 72.643,72.873 70.585,72.873
NetD4_2: D4.2 J6.2 R39.1 | length 5.7
  Top Layer w0.2: D4.2@11.244,37.922 D4.2@11.257,37.922 ; D4.2@11.27,37.922 12.413,37.922 v2(12.438,37.897) 13.741,37.897 14.224,38.379 R39.1@15.469,38.379
  Bot Layer w0.2: v2(12.438,37.897) 12.454,37.913 13.704,37.913 J6.2@13.72,37.929
NetD5_2: D5.2 J6.3 R40.1 | length 5.5
  Top Layer w0.2: D5.2@11.252,36.83 11.255,36.827 12.443,36.827 v2(12.446,36.825) 15.397,36.825 R40.1@15.418,36.805
  Bot Layer w0.2: v2(12.446,36.825) 12.448,36.827 13.718,36.827 J6.3@13.72,36.829
NetD6_2: D6.2 J6.5 R41.1 | length 5.5
  Top Layer w0.2: D6.2@11.252,34.646 11.26,34.638 12.438,34.638 v2(12.446,34.63) 15.446,34.63 R41.1@15.456,34.62
  Bot Layer w0.2: v2(12.446,34.63) J6.5@13.719,34.63
NetD7_2: D7.2 J6.7 R42.1 | length 5.5
  Top Layer w0.2: D7.2@11.252,32.487 11.278,32.461 12.421,32.461 v2(12.446,32.436) R42.1@15.456,32.436
  Bot Layer w0.2: v2(12.446,32.436) 12.449,32.432 13.717,32.432 J6.7@13.72,32.429
NetD8_2: D8.2 J6.9 R43.1 | length 3.9
  Top Layer w0.2: D8.2@14.368,40.767 v2(15.392,40.767) 17.221,40.767 R43.1@17.247,40.792
  Bot Layer w0.2: v2(15.392,40.767) 16.378,40.767 J6.9@16.4,40.789
NetJ2_1: J2.1 R1.2 | length 2.5
  Top Layer w0.175: R1.2@51.096,75.26 J2.1@53.618,75.26
NetJ3_11: J3.11 R13.2 | length 3.2
  Top Layer w0.25: v2(82.601,14.63) R13.2@82.601,15.761
  Bot Layer w0.2: J3.11@80.536,14.587 J3.11@80.58,14.63
  Bot Layer w0.25: J3.11@80.58,14.63 v2(82.601,14.63)
NetJ3_13: J3.13 R14.2 | length 8
  Top Layer w0.25: R14.2@75.997,11.214 76.022,11.189 v2(76.022,10.084)
  Bot Layer w0.25: v2(76.022,10.084) 76.048,10.109 76.073,10.084 78.943,10.084 80.536,11.677 J3.13@80.536,13.317
NetJ3_14: J3.14 R15.1 | length 6.3
  Top Layer w0.25: R15.1@74.422,11.189 74.447,11.163 v2(74.447,10.058)
  Bot Layer w0.25: v2(74.447,10.058) 74.447,13.081 74.683,13.317 J3.14@76.466,13.317
NetJ5_A5: J5.A5 R17.1 | length 5.7
  Top Layer w0.15: R17.1@82.093,47.422 84.023,47.422 85.351,48.75 J5.A5@87.292,48.75
NetJ5_B5: J5.B5 R18.1 | length 5.6
  Top Layer w0.15: R18.1@82.08,52.578 84.328,52.578 85.156,51.75 J5.B5@87.292,51.75
NetJ10_3: J10.3 R33.1 | length 2.7
  Top Layer w0.2: R33.1@9.386,63.881 9.389,63.878 10.111,63.878 10.468,63.521 v1(10.509,63.521)
  Bot Layer w0.2: v1(10.509,63.521) 10.535,63.495 11.311,63.495 11.313,63.496 J10.3@11.909,63.496
NetJ10_5: J10.5 R34.1 | length 2.7
  Top Layer w0.2: R34.1@9.386,62.103 10.111,62.103 10.475,62.467 v1(10.509,62.467)
  Bot Layer w0.2: v1(10.509,62.467) 10.537,62.495 11.908,62.495 J10.5@11.909,62.496
NetJ11_3: J11.3 R52.1 | length 2.5
  Top Layer w0.2: v1(12.979,51.664) 13.589,52.273 R52.1@14.313,52.273
  Bot Layer w0.2: J11.3@12.109,51.661 12.977,51.661 v1(12.979,51.664)
NetJ11_5: J11.5 R53.1 | length 2.2
  Top Layer w0.2: v1(13.005,50.673) 14.237,50.673 R53.1@14.313,50.749
  Bot Layer w0.2: J11.5@12.109,50.661 12.993,50.661 v1(13.005,50.673)
NetJ11_7: J11.7 R54.1 | length 2.4
  Top Layer w0.2: v1(13.005,49.632) 13.411,49.225 R54.1@14.313,49.225
  Bot Layer w0.2: J11.7@12.109,49.661 12.975,49.661 v1(13.005,49.632)
NetJ11_11: J11.11 pad.8@21.406,47.65 R56.1 | length 41.8
  Top Layer w0.2: v1(13.005,47.65) 28.473,47.65 44.933,31.191 R56.1@47.104,31.191
  Bot Layer w0.2: J11.11@12.109,47.661 12.994,47.661 v1(13.005,47.65)
NetL1_2: L1.2 U1.6 U1.7 U1.8 | length 6.3
  Top Layer w0.254: L1.2@26.047,84.404 26.721,84.404 ; U1.8@27.912,83.314 26.87,83.314 26.721,83.463 26.721,84.404 ; U1.7@27.912,84.414 27.902,84.404 26.721,84.404 ; U1.6@27.912,85.514 26.87,85.514 26.721,85.365 26.721,84.404
NetL3_1: L3.1 U10.4 | length 1.5
  Top Layer w0.175: L3.1@46.341,81.356 46.503,81.331 U10.4@47.836,81.331
NetL3_2: L3.2 U5.1 | length 1.7
  Top Layer w0.175: U5.1@43.75,81.387 44.262,81.356 L3.2@45.441,81.356
NetL4_1: L4.1 U9.2 | length 1.7
  Top Layer w0.2: L4.1@82.575,38.341 U9.2@82.575,40.056
NetR3_2: R3.2 U6.18 | length 1.7
  Top Layer w0.25: U6.18@37.084,22.606 37.109,22.581 38.722,22.581 R3.2@38.748,22.555
NetR4_2: R4.2 U6.17 | length 11.2
  Top Layer w0.25: R4.2@35.001,11.773 35.001,20.625 35.712,21.336 U6.17@37.084,21.336
NetR19_2: R19.2 U8.1 | length 3.5
  Top Layer w0.3: U8.1@77.861,57.943 77.861,59.04 78.105,59.284 80.073,59.284 R19.2@80.124,59.233
NetR21_2: R21.2 U8.4 | length 1.9
  Top Layer w0.3: R21.2@75.946,53.543 75.961,53.558 U8.4@75.961,55.443
NetR22_1: R22.1 S2.1 | length 4.5
  Top Layer w0.2: R22.1@85.649,62.763 R22.1@85.671,62.786
  Top Layer w0.3: R22.1@85.671,62.786 S2.1@90.17,62.786
NetR23_1: R23.1 R24.2 | length 1.4
  Top Layer w0.4: R24.2@82.829,65.761 R23.1@84.225,65.761
NetR25_1: R25.1 U8.3 | length 4.3
  Top Layer w0.3: R25.1@73.99,58.103 73.99,59.055 74.32,59.385 75.692,59.385 75.961,59.116 U8.3@75.961,57.943
NetR26_1: R26.1 U9.4 | length 6.5
  Top Layer w0.2: U9.4@83.075,41.732 83.069,41.738 83.069,42.15 83.287,42.367 83.871,42.367 84.074,42.164 84.074,41.402 86.284,39.192 R26.1@86.284,38.164
NetR49_1: R49.1 U4.138 | length 6.3
  Top Layer w0.254: R49.1@51.943,35.687 v1(52.832,35.687) ; v1(55.753,34.163) 55.753,34.096 55.902,33.947 U4.138@55.902,32.348
  Bot Layer w0.254: v1(52.832,35.687) 54.229,35.687 v1(55.753,34.163)
NetR57_1: R57.1 U12.5 | length 6.1
  Top Layer w0.25: U12.5@17.663,17.094 18.468,17.094 18.644,16.918 18.644,14.247 18.819,14.072 19.662,14.072 19.837,14.247 R57.1@19.837,15.252
NetR58_1: R58.1 U13.5 | length 4.1
  Top Layer w0.2: U13.5@50.902,52.299 50.902,53.162 51.13,53.391 52.553,53.391 53.01,52.934 R58.1@53.01,52.083
NetR59_1: R59.1 U3.3 | length 1.3
  Top Layer w0.2: R59.1@44.45,55.868 45.148,55.868 45.324,55.692 45.636,55.692 U3.3@45.686,55.642
NetR62_1: R62.1 U2.13 | length 2.1
  Top Layer w0.25: U2.13@58.099,52.056 58.099,49.964 R62.1@58.101,49.962
NetR64_1: R64.1 U2.14 | length 2.8
  Top Layer w0.25: U2.14@58.599,52.056 58.599,51.357 58.877,51.079 59.436,51.079 59.625,50.89 R64.1@59.625,49.962
NetU4_58: U4.58 U12.3 | length 59.2
  Top Layer w0.25: U12.3@15.763,16.444 14.849,16.444 14.732,16.327 14.732,15.837 14.732,15.758 14.817,15.673 19.27,12.556 39.333,2.032 57.226,2.032 63.402,8.208 U4.58@63.402,10.872
NetU4_128: U4.128 U13.3 | length 21.9
  Top Layer w0.25: U13.3@51.552,50.399 51.552,46.721 60.902,37.371 U4.128@60.902,32.348
NRST_2: C21.1 J3.12 S1.1 S1.2 U4.25 | length 33.6
  Top Layer w0.2: v1(49.53,18.335) 49.542,18.347 50.902,18.347 U4.25@50.914,18.36 ; v1(52.324,18.288) 56.007,14.605 66.497,14.605 v1(66.548,14.656)
  Bot Layer w0.2: v1(49.53,18.335) 49.554,18.312 52.3,18.312 v1(52.324,18.288) ; S1.2@64.45,14.613 66.505,14.613 v1(66.548,14.656) C21.1@66.548,16.191 ; v1@66.591,14.613 66.633,14.656 68.908,14.656 68.977,14.587 J3.12@76.466,14.587
PDM_CLK_1: R56.2 U4.1 | length 2.6
  Top Layer w0.2: R56.2@48.704,31.191 48.749,31.146 49.499,31.146 50.235,30.41 50.864,30.41 U4.1@50.914,30.36
PDM_D1_1: pad.5 R52.2 U4.5 | length 45.6
  Top Layer w0.2: R52.2@15.913,52.273 26.899,52.273 v1(45.237,33.934) ; v1(49.428,28.626) 49.436,28.626 49.696,28.366 50.908,28.366 U4.5@50.914,28.36
  Bot Layer w0.2: v1(45.237,33.934) 45.237,33.909 49.428,29.718 v1(49.428,28.626)
PDM_D2_1: pad.6 R53.2 U4.3 | length 43.8
  Top Layer w0.2: R53.2@15.913,50.749 27.432,50.749 45.314,32.868 v1(45.314,32.817) ; v1(48.412,29.337) 48.424,29.349 50.583,29.349 U4.3@50.596,29.361
  Bot Layer w0.2: v1(45.314,32.817) 48.355,29.775 48.355,29.394 v1(48.412,29.337)
PDM_D3_1: pad.7 R54.2 U4.22 | length 53.3
  Top Layer w0.2: R54.2@15.913,49.225 15.964,49.276 28.008,49.276 36.645,40.639 36.645,40.546 v1(45.339,31.852) ; v1(49.022,19.885) 49.034,19.873 50.902,19.873 U4.22@50.914,19.86
  Bot Layer w0.2: v1(45.339,31.852) 45.339,31.826 46.736,30.429 46.736,20.209 47.06,19.885 v1(49.022,19.885)
SCL_3: R36.2 U1.17 | length 14
  Top Layer w0.254: R36.2@33.02,79.756 33.02,89.408 33.526,89.914 U1.17@37.112,89.914
SD_CS: R39.2 U4.13 | length 43.1
  Top Layer w0.2: R39.2@17.056,38.354 18.669,38.354 19.893,37.13 36.327,37.13 41.3,32.156 41.3,26.264 43.204,24.36 50.376,24.36 U4.13@50.914,24.36
SD_DET: R43.2 U4.12 | length 42.2
  Top Layer w0.2: R43.2@18.91,40.767 20.21,40.767 23.436,37.541 36.5,37.541 41.783,32.258 41.783,26.492 43.409,24.867 U4.12@51.138,24.867
SD_MISO: R42.2 U4.20 | length 45.1
  Top Layer w0.2: R42.2@17.056,32.436 17.831,32.436 21.209,35.814 35.839,35.814 38.999,32.654 39.004,32.654 39.385,32.273 39.385,32.268 39.776,31.877 39.776,25.629 43.942,21.463 49.403,21.463 50.004,20.862 50.912,20.862 U4.20@50.914,20.86
SD_MOSI: R40.2 U4.21 | length 44.3
  Top Layer w0.2: R40.2@17.056,36.83 17.132,36.754 36.093,36.754 40.792,32.055 40.792,25.984 44.448,22.328 v1(47.678,22.328) ; v1(49.111,20.863) 49.614,20.36 U4.21@50.914,20.36
  Bot Layer w0.2: v1(47.678,22.328) 47.678,22.312 49.111,20.879 v1(49.111,20.863)
SD_SCK: R41.2 U4.19 | length 44.4
  Top Layer w0.2: R41.2@17.056,34.62 18.237,34.62 19.914,36.297 35.941,36.297 40.284,31.953 40.284,25.781 44.237,21.828 49.546,21.828 50.008,21.366 50.908,21.366 U4.19@50.914,21.36
SDA_3: R35.2 U1.16 | length 14.5
  Top Layer w0.254: R35.2@34.544,76.746 34.544,88.665 34.693,88.814 U1.16@37.112,88.814
SWCLK_2: J3.6 U4.109 | length 20.1
  Top Layer w0.2: U4.109@70.402,32.348 70.405,32.351 70.405,33.601 v1(70.409,33.604)
  Bot Layer w0.2: v1(70.409,33.604) 72.39,31.623 72.39,20.574 74.297,18.667 76.196,18.667 J3.6@76.466,18.397
SWDIO_2: J3.4 U4.105 | length 12.8
  Top Layer w0.2: U4.105@72.39,28.86 72.393,28.857 73.657,28.857 v1(73.66,28.854)
  Bot Layer w0.2: v1(73.66,28.854) 73.741,28.854 74.173,28.423 74.173,20.011 74.517,19.667 J3.4@76.466,19.667
USB_D_1_N: U4.103 U7.4 | length 28.9
  Top Layer w0.15: U4.103@72.39,27.86 74.139,27.86 75.667,29.388 75.667,48.477 75.754,48.565 77.394,48.565 v1(77.419,48.539) ; v1(77.405,49.525) 77.405,50.354 77.978,50.927 78.875,50.927 U7.4@79.4,50.95
  Bot Layer w0.15: v1(77.405,49.525) 77.412,49.518 77.412,48.546 v1(77.419,48.539)
USB_D_1_P: U4.104 U7.6 | length 28.9
  Top Layer w0.15: U4.104@72.39,28.36 74.232,28.36 75.362,29.489 75.362,48.833 cw(c75.578,48.833) 75.54,49.046 cw(c75.578,48.833) 75.578,49.05 75.615,49.05 ccw(c75.615,49.379) 75.944,49.379 75.944,49.959 cw(c76.273,49.959) 76.273,50.288 cw(c76.273,49.959) 76.602,49.959 76.602,49.379 ccw(c76.931,49.379) 76.931,49.05 77.347,49.05 U7.6@79.4,49.05
V_FB_5: R27.1 R28.2 R29.1 U9.6 | length 11.4
  Top Layer w0.2: R27.1@76.835,39.535 76.708,39.662 76.708,42.545 77.216,43.053 79.324,43.053 ; 77.8,43.157 R28.2@77.8,43.954 ; R29.1@79.324,43.979 79.324,43.053 ; U9.6@82.075,41.732 82.075,42.486 81.509,43.053 79.324,43.053
VCC_RF_3: C7.1 C8.2 U1.14 U5.6 | length 13.8
  Top Layer w0.254: U1.14@37.112,86.614 38.583,86.614 ; C7.1@39.751,86.563 39.7,86.614 38.583,86.614 ; C8.2@39.954,80.927 39.954,81.238 40.103,81.387 U5.6@41.25,81.387 42.447,81.387 42.596,81.535 42.596,84.15 41.304,85.442 39.041,85.442 38.583,85.901 38.583,86.614
VCP_RX_2: R15.2 U4.75 | length 3
  Top Layer w0.25: U4.75@72.39,13.86 74.176,13.86 74.422,13.614 R15.2@74.422,12.789
VCP_TX_2: R14.1 U4.76 | length 5
  Top Layer w0.25: U4.76@72.39,14.36 75.7,14.36 75.997,14.064 R14.1@75.997,12.814
pads on no net: J3.1 J3.2 J3.8 J3.9 J3.10 J3.15 J3.16 J5.A8 J5.B8 J5.MH2 J5.MH3 J5.MH4 J5.MH5 J5.MH6 J6.1 J6.8 J6.14 J6.15 J10.7 J10.8 J11.9 J11.MP1 J11.MP2 M1.1 M2.1 M3.1 M4.1 U1.15 U1.18 U2.10 U2.11 U3.2 U3.7 U3.11 U3.12 U4.2 U4.4 U4.7 U4.14 U4.15 U4.18 U4.26 U4.27 U4.28 U4.29 U4.36 U4.37 U4.50 U4.53 U4.54 U4.55 U4.56 U4.57 U4.59 U4.60 U4.63 U4.64 U4.65 U4.66 U4.67 U4.68 U4.69 U4.73 U4.74 U4.77 U4.78 U4.79 U4.80 U4.81 U4.82 U4.85 U4.86 U4.87 U4.88 U4.89 U4.90 U4.91 U4.92 U4.93 U4.96 U4.97 U4.98 U4.99 U4.100 U4.101 U4.102 U4.115 U4.116 U4.118 U4.119 U4.122 U4.123 U4.124 U4.125 U4.126 U4.127 U4.129 U4.133 U4.141 U6.21 U12.4 U13.4

## Polygon pours and split planes (outlines as drawn)
GND on Top Layer "tdr" (solid, remove dead copper, shelved, pour order 12): 0,0 95,0 95,100 0,100
+3VLORA on Top Layer "NONET_L03_P-001" (solid, shelved, pour order 8): 17.138,19.304 22.327,19.304 24.765,19.304 24.765,16.002 19.017,16.002 17.138,17.88
+V_USB on Top Layer "NONET_L-01_P-001" (solid, shelved, pour order 6): 77.622,55.855 81.89,55.855 81.89,53.619 77.622,53.619
+3V on Top Layer "NONET_L-01_P-001" (solid, shelved, pour order 5): 80.543,35.168 79.883,35.168 79.883,32.842 80.594,32.131 80.594,29.058 84.76,29.058 84.76,32.385 85.242,32.868 85.242,35.139 84.557,35.139
+3V on Top Layer "NONET_L-01_P-001" (solid, shelved, pour order 2): 48.146,15.113 48.382,15.349 48.382,16.002 50.027,16.002 50.027,15.113 51.613,15.113 51.613,14.097 50.063,14.097 49.225,13.259 44.679,13.259 44.679,15.113
+3VIMU on Top Layer "NONET_L-01_P-001" (solid, shelved, pour order 1): 57.386,53.556 56.007,53.556 56.007,53.193 54.428,53.193 54.428,56.193 56.778,56.193 57.386,55.787
+3V on Top Layer "NONET_L-01_P-001" (solid, shelved, pour order 0): 25.73,85.252 25.73,82.448 22.022,82.448 22.022,85.232
+3VIMU on Top Layer "NONET_L03_P-001" (solid, shelved, pour order 10): 47.473,58.318 50.8,58.318 50.952,58.166 50.952,56.667 50.063,55.778 47.086,55.778 47.086,57.932
+3V on VCC "NONET_L-01_P-001" (solid, shelved, pour order 13): 0.006,99.879 93.308,99.879 93.308,0.62 0.006,-0.937
BAT+ on VCC "NONET_L-01_P-001" (solid, shelved, pour order 3): 81.153,38.227 93.308,38.227 93.308,74.879 93.282,74.854 75.692,74.854 75.692,43.688
+3VIMU on VCC "NONET_L03_P-001" (solid, shelved, pour order 4): 43.7,56.896 43.7,53.074 47.625,49.149 54.61,49.149 59.436,53.975 59.436,56.896
GND on Bot Layer "NONET_L03_P-001" (solid, remove dead copper, shelved, pour order 11): 0,0 95,0 95,100 0,100
GND on GND "NONET_L03_P-001" (solid, shelved, pour order 9): 0,0 95,0 95,100 0,100

## Other copper
Top Layer:
  text "Layer Name: '.Layer_Name'" at -5,-63.306 h1.5
GND:
  text "Layer Name: '.Layer_Name'" at -5,-63.306 h1.5
VCC:
  text "Layer Name: '.Layer_Name'" at -5,-63.306 h1.5
Bot Layer:
  text "Layer Name: '.Layer_Name'" at -5,-63.306 h1.5

## Silkscreen, mask and mechanical layers (free items; w line width, h text height)
Top Overlay:
  lines w0.4: 79.502,68.072 80.01,67.564 ; 79.502,69.748 80.01,70.256 ; 80.01,68.58 80.01,67.564 ; 80.01,69.24 80.01,70.256 ; 80.518,68.072 80.01,67.564 ; 80.518,69.748 80.01,70.256
  text "Li-Ion  / Battery" at 67.257,84.656 h2.5
  text "+" at 66.812,82.677 h2
  text "-" at 75.809,82.677 h2
  text "OFF / ON" at 81.006,66.91 h2.5
  text "CHRG" at 87.314,38.403 h2
  text "Layer Name: '.Layer_Name'" at -5,-63.306 h1.5
Bottom Overlay:
  text "Layer Name: '.Layer_Name'" at -5,-63.306 h1.5
Top Paste:
  text "Layer Name: '.Layer_Name'" at -5,-63.306 h1.5
Bottom Paste:
  text "Layer Name: '.Layer_Name'" at -5,-63.306 h1.5
Top Solder:
  rectangle: 45.441,54.889 47.549,56.896
  region: 47.686,82.092 48.486,82.092 48.486,82.005 48.686,81.805 48.986,81.805 48.986,81.43 48.686,81.43 48.486,81.23 48.486,81.143 47.686,81.143
  text "Layer Name: '.Layer_Name'" at -5,-63.306 h1.5
Bottom Solder:
  text "Layer Name: '.Layer_Name'" at -5,-63.306 h1.5
Panel outline:
  lines w0.1: 93.308,24.879 cw(c50.006,49.879) 93.308,74.879 ; 93.308,24.879 cw(c50.006,49.879) 93.308,74.879 ; 93.308,24.879 93.308,45.204 88.508,45.204 cw(c88.508,45.705) 88.007,45.705 88.007,54.3 cw(c88.508,54.3) 88.508,54.8 93.308,54.8 93.308,74.879
  text "Layer Name: '.Layer_Name'" at -5,-63.306 h1.5
Route Tool Path:
  lines w1: 94,45.705 88.508,45.705 88.492,45.72 88.492,50.002 88.492,54.3 94,54.3
  text "Layer Name: '.Layer_Name'" at -5,-63.306 h1.5
Top 3D Body:
  text "Layer Name: '.Layer_Name'" at -5,-63.306 h1.5
Bottom 3D Body:
  text "Layer Name: '.Layer_Name'" at -5,-63.306 h1.5
Mfg Info:
  drawing of 295 lines, arcs and shapes, not listed
  text "JLC04161H-3313 Stackup" at -3.899,-21.266 h2
  text "Layer" at -2.494,-24.327 h0.98
  text "Name" at 4.393,-24.327 h0.98
  text "Material" at 19.784,-24.327 h0.98
  text "Thickness" at 34.031,-24.327 h0.98
  text "Constant" at 44.843,-24.327 h0.98
  text "Board Layer Stack" at 54.347,-24.327 h0.98
  text "Top Overlay" at 4.393,-26.291 h0.98
  text "Top Solder" at 4.393,-28.254 h0.98
  text "Solder Resist" at 19.784,-28.254 h0.98
  text "0.010mm" at 34.031,-28.254 h0.98
  text "3.5" at 44.843,-28.254 h0.98
  text "1" at -2.494,-30.217 h0.98
  text "Top Layer" at 4.393,-30.217 h0.98
  text "0.035mm" at 34.031,-30.217 h0.98
  text "Dielectric 2" at 4.393,-32.18 h0.98
  text "3313" at 19.784,-32.18 h0.98
  text "0.099mm" at 34.031,-32.18 h0.98
  text "4.1" at 44.843,-32.18 h0.98
  text "2" at -2.494,-34.143 h0.98
  text "GND" at 4.393,-34.143 h0.98
  text "CF-004" at 19.784,-34.143 h0.98
  text "0.015mm" at 34.031,-34.143 h0.98
  text "Dielectric 1" at 4.393,-36.107 h0.98
  text "FR-4" at 19.784,-36.107 h0.98
  text "1.265mm" at 34.031,-36.107 h0.98
  text "4.6" at 44.843,-36.107 h0.98
  text "3" at -2.494,-38.07 h0.98
  text "VCC" at 4.393,-38.07 h0.98
  text "CF-004" at 19.784,-38.07 h0.98
  text "0.015mm" at 34.031,-38.07 h0.98
  text "Dielectric 3" at 4.393,-40.033 h0.98
  text "3313" at 19.784,-40.033 h0.98
  text "0.099mm" at 34.031,-40.033 h0.98
  text "4.1" at 44.843,-40.033 h0.98
  text "4" at -2.494,-41.996 h0.98
  text "Bot Layer" at 4.393,-41.996 h0.98
  text "0.035mm" at 34.031,-41.996 h0.98
  text "Bottom Solder" at 4.393,-43.959 h0.98
  text "Solder Resist" at 19.784,-43.959 h0.98
  text "0.010mm" at 34.031,-43.959 h0.98
  text "3.5" at 44.843,-43.959 h0.98
  text "Bottom Overlay" at 4.393,-45.923 h0.98
  text "Total board thickness:" at -2.494,-47.886 h0.98
  text "1.585mm" at 34.031,-47.886 h0.98
  text "Layer Name: '.Layer_Name'" at -5,-63.306 h1.5
Mechanical 13:
  text "Layer Name: '.Layer_Name'" at -5,-63.306 h1.5
Drill Drawing:
  text "Layer Name: '.Layer_Name'" at -5,-63.306 h1.5

## Dimensions
50.006,-0.121 to 50.006,99.879 on Mfg Info
0.006,49.879 to 93.308,74.879 on Mfg Info

## Text inside footprints (layer, text, board x,y; h text height)
U15: Bottom Overlay "PCB" at 69.66,70.485 h2 r90; Bottom Overlay "Author" at 71.66,70.485 h2 r90; Bottom Overlay "PROJECT" at 67.66,70.485 h2 r90; Bottom Overlay "Date" at 73.66,70.485 h2 r90